# Altium PCB IG-2.PCBDOC (part 2 of 3)
Units mm, origin at the board's own origin, x right, y up, seen from the top; angles counter-clockwise.
Board outline 46.6 x 24.5 mm, 4 copper layers (Top, GND Plane, Mid1-Ver, Bottom), stack 1.565 mm thick; 34 components, 46 nets, 339 pads, 275 vias.
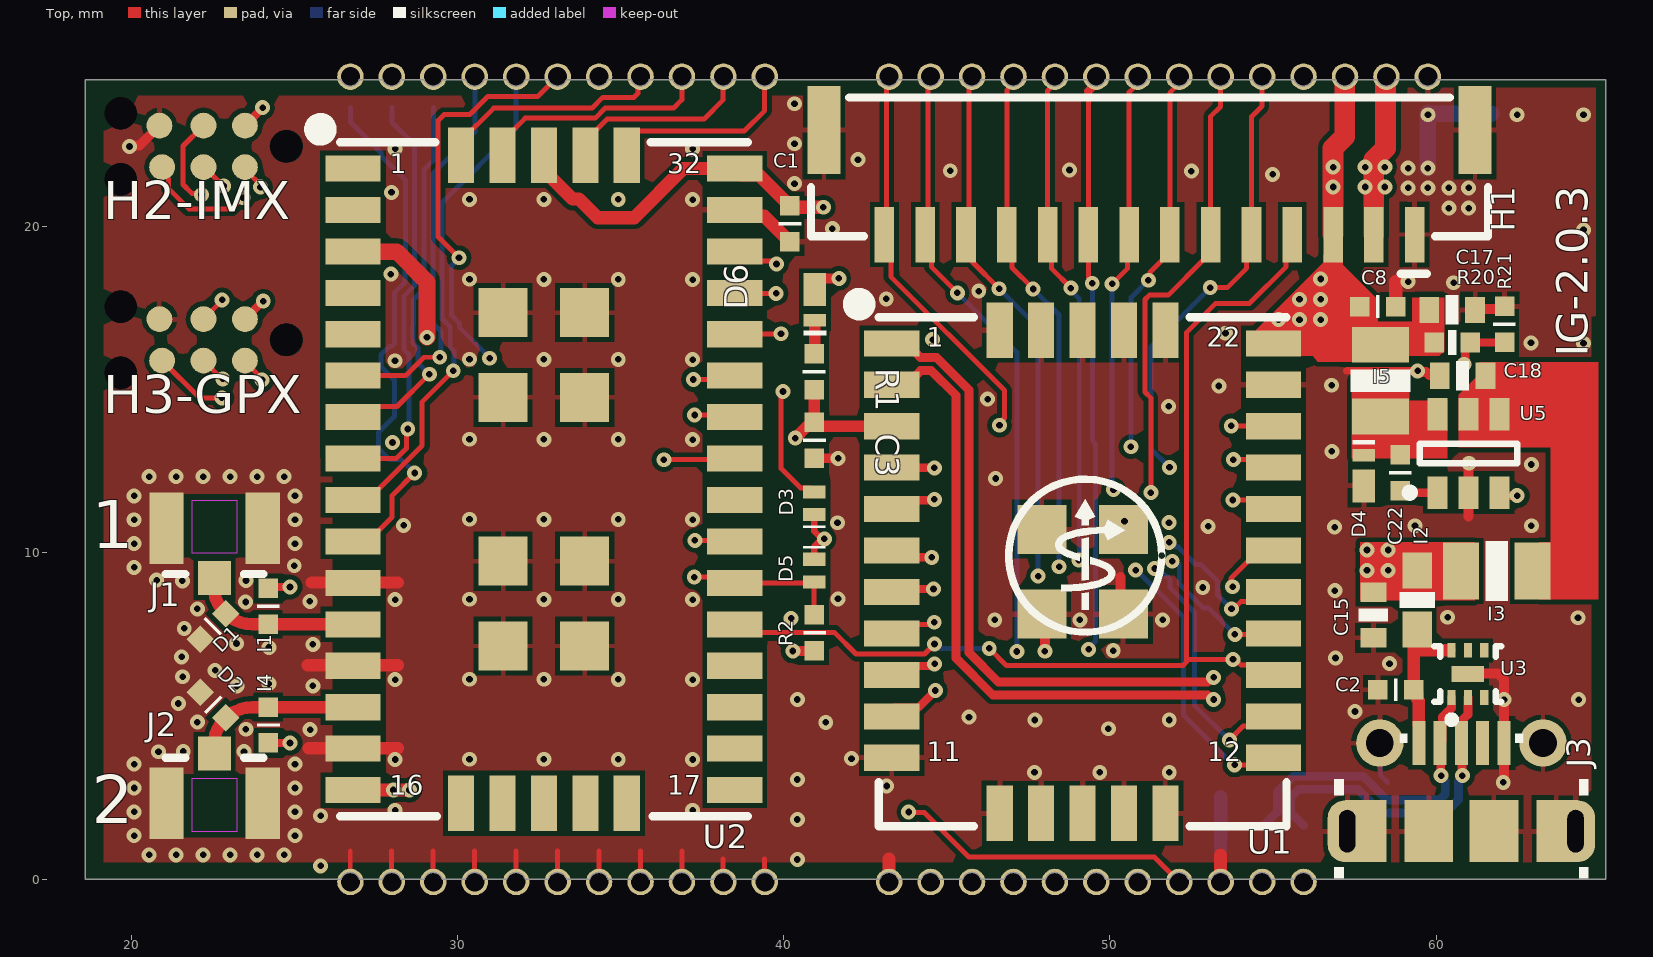
[diagram p0: Top view]

## Via types
v1: diameter 0.457, hole 0.203, Top to Bottom, 275 vias

## Nets (pads, with @x,y where several pads share a name; then routed paths per layer and width w, separated by ;. In a path a pad name is that pad's centre, name@x,y a point inside that pad or via, vN(x,y) a via of type N, cw(c..) or ccw(c..) an arc to the next point about the centre after c; other vN are vias at no path point) (continued)
G6/Rx1/MOSI: (continued)
  Bottom w0.152: v1@48.803,18.114 48.803,18.042 49.059,17.787 49.059,9.793 v1(49.043,9.777)
  other v1: 48.803,18.111
G7/Tx1/MISO: H1.11 U1.7 U4.11 | length 21.5
  Top w0.152: U4.11@47.038,24.539 47.038,24.374 46.837,24.173 H1.11@46.837,19.751 46.995,19.593 46.995,18.735 47.645,18.085 v1(47.645,18.082)
  Top w0.254: U1.7@43.136,8.797 43.227,8.888 v1(44.593,8.888)
  Mid1-Ver w0.152: v1@44.606,8.888 44.606,8.9 45.436,9.73 47.964,9.73 48.067,9.628 48.382,9.628 v1(48.441,9.569)
  Bottom w0.152: v1@47.647,18.083 47.647,18.08 48.441,17.286 v1(48.441,9.569)
G8/C\S\/STRB: H1.12 U1.8 U4.12 | length 21.7
  Top w0.152: U1.8@43.136,7.527 43.409,7.8 44.488,7.8 44.558,7.87 v1(44.613,7.87) ; U4.12@45.768,24.539 45.677,24.448 45.677,19.842 H1.12@45.587,19.751 45.785,19.553 45.785,18.911 v1@46.606,18.091
  Mid1-Ver w0.152: v1@44.586,7.87 v1(44.613,7.87) 46.027,9.284 v1(47.8,9.284)
  Bottom w0.152: v1(46.604,18.089) 47.8,16.893 v1(47.8,9.284)
G9/S\P\I\_\E\N\/DRDY/STRB: H1.13 U1.10 U4.13 | length 23.2
  Top w0.152: U4.13@44.498,24.539 44.417,24.458 44.417,19.832 H1.13@44.337,19.751 44.526,19.562 44.526,18.765 45.322,17.969 v1(45.322,17.965)
  Top w0.254: U1.10@43.409,5.26 44.13,5.26 v1(44.65,5.78)
  Mid1-Ver w0.152: v1(44.65,5.78) 45.508,6.638 46.813,6.638 v1(47.146,6.972)
  Bottom w0.152: v1@45.324,17.967 47.146,16.145 v1(47.146,6.972)
G10/CHIP_ERASE: U1.17 U4.17 | length 14.5
  Top w0.152: v1(53.757,8.958) 53.708,9.006 53.708,9.207 53.705,9.211 54.561,10.067 U1.17@55.186,10.067
  Mid1-Ver w0.152: U4.17@45.773,-0.09 49.106,3.243 49.106,4.407 53.258,8.559 53.357,8.559 53.756,8.958 v1(53.757,8.958)